# Altium PCB ESP-WROOM32.PcbDoc (part 1 of 3)
Units mm, origin at the board's own origin, x right, y up, seen from the top; angles counter-clockwise.
Board outline 17.3 x 15.5 mm, 2 copper layers (L1, L2); 42 components, 55 nets, 176 pads, 91 vias.
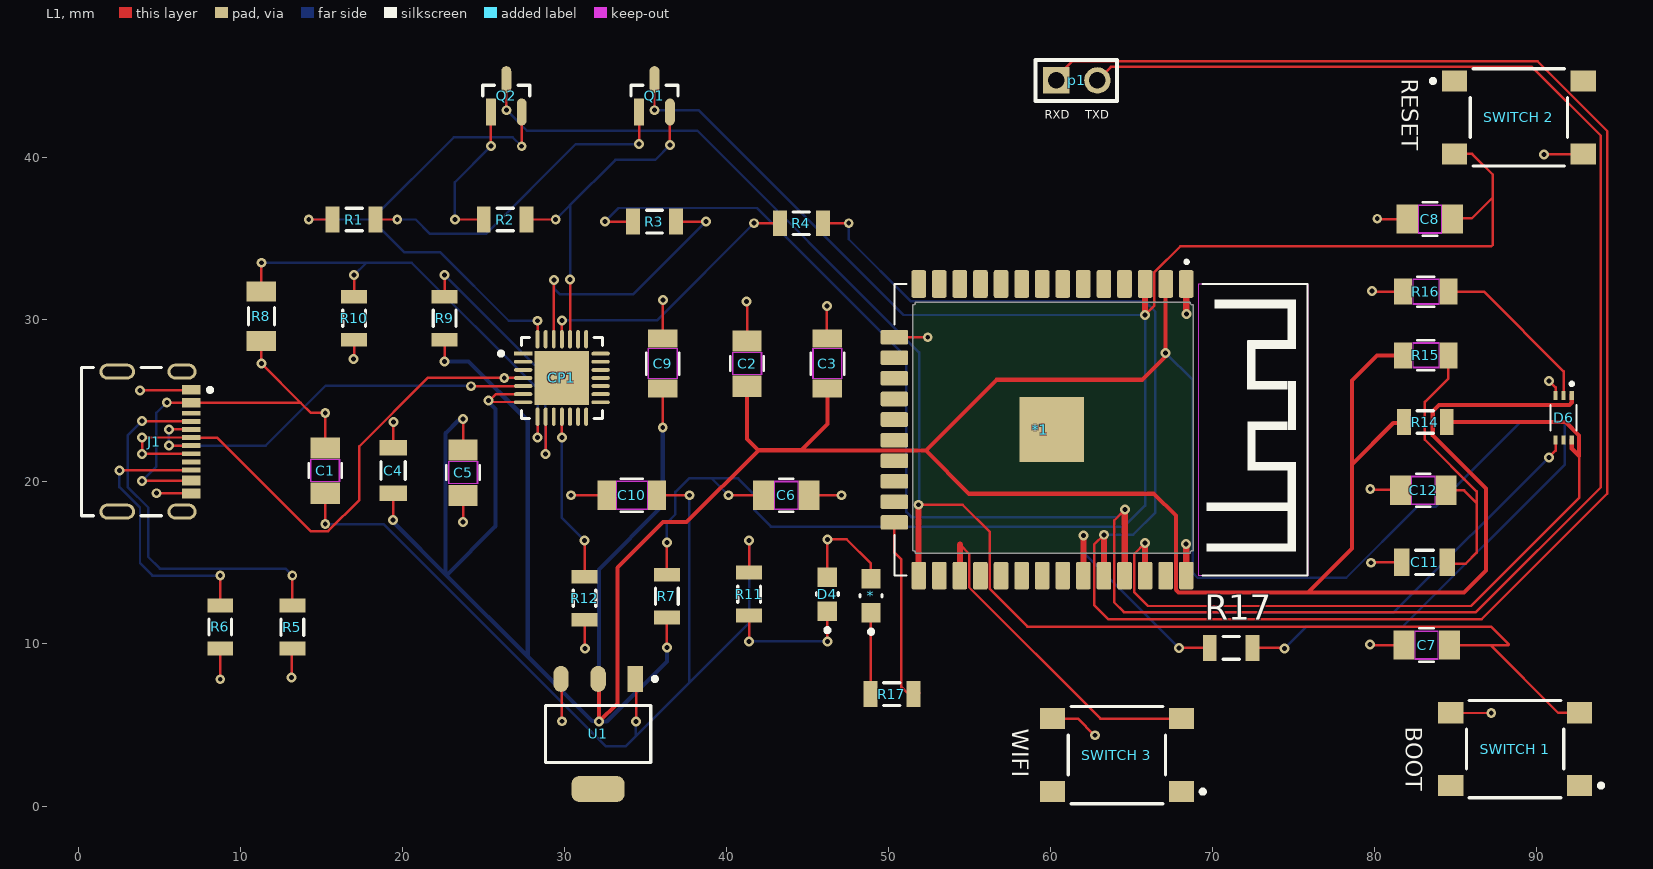
[diagram p0: L1 view]
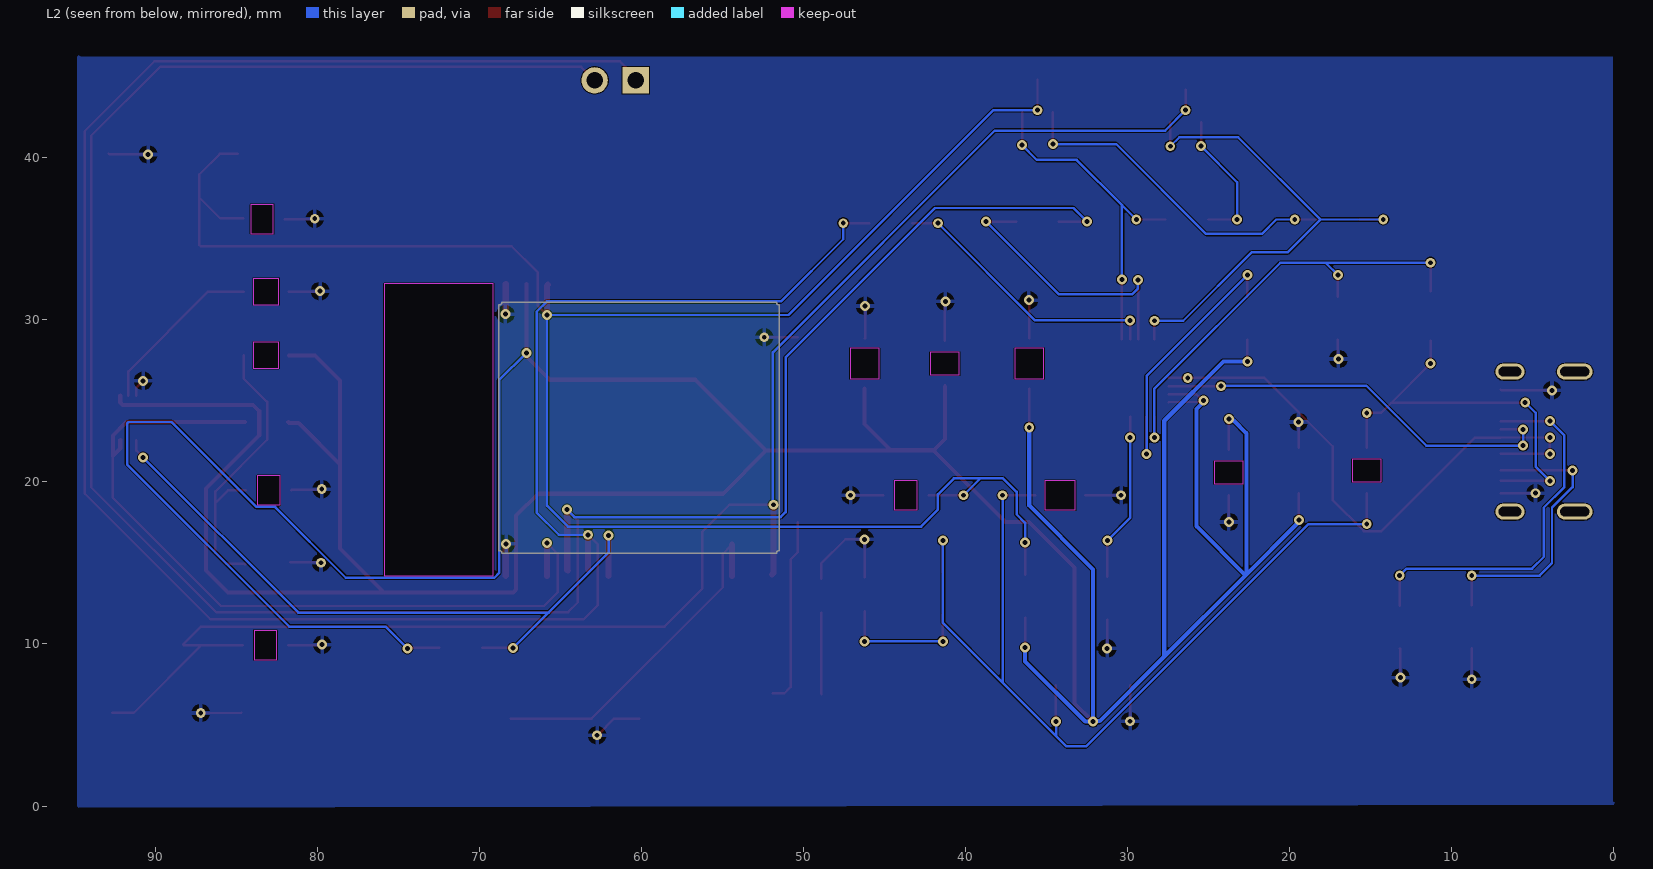
[diagram p1: L2 view, seen from below]

## Layer stack, top to bottom
Top Solder: solder mask 0.0102, Solder Resist, Dk 3.5
L1: signal copper 0.0356
Dielectric 1: prepreg 0.32, PP-006, Dk 4.8
L2: signal copper 0.0356
Bottom Solder: solder mask 0.0102, Solder Resist, Dk 3.5

## Board outline
68.624,31.093 51.663,31.093 51.664,31.072 51.662,31.044 51.654,31.016 51.641,30.991 51.623,30.969 51.602,30.95 51.577,30.936 51.55,30.926 51.522,30.922 51.494,30.923 51.494,15.762 51.522,15.763 51.55,15.759 51.577,15.75 51.602,15.735 51.623,15.717 51.641,15.694 51.654,15.669 51.662,15.642 51.664,15.613 51.663,15.593 68.624,15.593 68.623,15.62 68.627,15.648 68.636,15.674 68.649,15.698 68.667,15.719 68.688,15.737 68.712,15.75 68.739,15.759 68.766,15.763 68.794,15.762 68.794,30.923 68.766,30.922 68.739,30.926 68.712,30.935 68.688,30.948 68.667,30.966 68.649,30.987 68.636,31.011 68.627,31.038 68.623,31.065

## Design rules (kind name [scope] priority, off if disabled: settings)
Clearance [All] p1: gap=0.051 ignorepadtopadclearanceinfootprint=FALSE
MinimumSolderMaskSliver [All] p1: minsoldermaskwidth=0.076
PlaneConnect [All] p1: planeconnectstyle=Direct reliefexpansion=0.508 reliefentries=4 reliefconductorwidth=0.254 reliefairgap=0.254
PolygonConnect [All] p1: connectstyle=Relief reliefconductorwidth=0.254 reliefentries=4 polygonreliefangle="90 Angle" airgapwidth=0.254
RoutingVias [All] p1: holewidth=0.305 width=0.61 viastyle="Through Hole" minholewidth=0.305 minwidth=0.61 maxholewidth=0.305 maxwidth=0.61
SilkToSolderMaskClearance [IsPad] p1: minsilkscreentomaskgap=0.102 clearancetoexposedcopper=TRUE
SolderMaskExpansion [All] p1: expansion=0.076 istentingtop=FALSE
SupplyNets "Schematic Supply Nets_1" [InNet('VDD33')] p1: voltage=0.000
SupplyNets "Schematic Supply Nets_3" [InNet('GND')] p2: voltage=0.000
SupplyNets "Schematic Supply Nets_2" [InNet('EXT_5V')] p3: voltage=0.000
SupplyNets "Schematic Supply Nets" [InNet('VBUS')] p4: voltage=0.000
Width [All] p1: maxlimit=2.54 minlimit=0.152 preferedwidth=0.152 minimp=50.000000 maximp=50.000000 favimp=50.000000
27 further rules are at their usual default settings.

## Components (designator, comment, footprint, x,y, rotation, side; value= is the part's Value field where it differs from the comment)
* "LTST-C170GKT" FP-LTST-C170GKT-MFG 48.92,12.979 r90 top
*1 "ESP32-WROOM-32E-N4" MODULE_ESP-WROOM-32 60.122,23.216 r270 top
C1 "0.1uF/50V(10%)" CAPC340180_135N_KEM 15.24,20.701 r270 top value=100nF
C2 "0.1uF/50V(10%)" CAPC340180_135N_KEM 41.275,27.305 r270 top value=100nF
C3 "22uF/10V(20%)" CAP_CC1206_YAG 46.228,27.305 r270 top value=22µF
C4 "10uF/10V(20%)" CAPC1206(3216)190_L 19.431,20.701 r270 top value=10µF
C5 "0.1uF/50V(10%)" CAPC340180_135N_KEM 23.749,20.574 r90 top value=100nF
C6 "0.1uF/50V(10%)" CAPC340180_135N_KEM 43.688,19.177 r180 top value=100nF
C7 "0.1uF/50V(10%)" CAPC340180_135N_KEM 83.21,9.931 r0 top value=100nF
C8 "0.1uF/50V(10%)" CAPC340180_135N_KEM 83.414,36.22 r0 top value=100nF
C9 "22uF/10V(20%)" CAP_CC1206_YAG 36.068,27.305 r270 top value=22µF
C10 "22uF/10V(20%)" CAP_CC1206_YAG 34.163,19.177 r0 top value=22µF
C11 "10uF/10V(20%)" CAPC1206(3216)190_L 83.083,15.037 r0 top value=10µF
C12 "0.1uF/50V(10%)" CAPC340180_135N_KEM 83.007,19.482 r0 top value=100nF
CP1 "CP2102N-A02-GQFN28" FP-CP2102N-A02-GQFN28-IPC_A 29.845,26.416 r0 top
D4 "LTST-C170GKT" FP-LTST-C170GKT-MFG 46.228,13.081 r90 top
D6 "BH1750" XDCR_BH1750FVI-TR 91.669,23.952 r270 top
J1 "USB-C" FP-2171790001-MFG 3.554,22.489 r270 top
p1 "342-10-102-00-591000" header 60.35,44.78 r90 top
Q1 "SS8050-G" FP-SS8050-G-IPC_A 35.56,43.83 r90 top
Q2 "SS8050-G" FP-SS8050-G-IPC_A 26.416,43.83 r90 top
R1 "10K(5%)" "RESC3116X65X40LL10T20 - duplicate" 17.018,36.195 r0 top value=10kΩ
R2 "10K(5%)" "RESC3116X65X40LL10T20 - duplicate" 26.344,36.195 r180 top value=10kΩ
R3 "10K(5%)" "RESC3116X65X40LL10T20 - duplicate" 35.56,36.068 r180 top value=10kΩ
R4 "10K(5%)" "RESC3116X65X40LL10T20 - duplicate" 44.628,35.966 r0 top value=10kΩ
R5 "5.1K" RESC3116X65X40LL10T20 13.208,11.043 r90 top value=5.1kΩ
R6 "5.1K" RESC3116X65X40LL10T20 8.763,11.049 r90 top value=5.1kΩ
R7 "10K(5%)" "RESC3116X65X40LL10T20 - duplicate" 36.322,12.954 r270 top value=10kΩ
R8 "22.1K(1%)" FP-AC1206-IPC_A 11.303,30.226 r90 top value=22.1kΩ
R9 "2K(5%)" RESC3116X65X40LL10T20 22.606,30.099 r90 top value=2kΩ
R10 "47.5K(1%)" "RESC3116X65X40LL10T20 - duplicate" 17.018,30.099 r90 top value=47.5kΩ
R11 "10K(5%)" "RESC3116X65X40LL10T20 - duplicate" 41.402,13.081 r90 top value=10kΩ
R12 "10K(5%)" "RESC3116X65X40LL10T20 - duplicate" 31.242,12.827 r90 top value=10kΩ
R14 "4.7KOHM" RESC3116X65X40LL10T20 83.134,23.698 r180 top value=47kΩ
R15 "1kohm" RC1206N_YAG 83.16,27.813 r180 top value=1kΩ
R16 "1kohm" RC1206N_YAG 83.16,31.75 r0 top value=1kΩ
R17 "4.7KOHM" RESC3116X65X40LL10T20 71.145,9.754 r0 top value=47kΩ
R17 "4.7KOHM" RESC3116X65X40LL10T20 50.216,6.909 r0 top value=47kΩ
"SWITCH 1" "PTS645SL50SMTR92LFS" FP-PTS645SH50SMTR92LFS-MFG 88.671,3.505 r180 top
"SWITCH 2" "PTS645SL50SMTR92LFS" FP-PTS645SH50SMTR92LFS-MFG 88.9,42.494 r0 top
"SWITCH 3" "PTS645SL50SMTR92LFS" FP-PTS645SH50SMTR92LFS-MFG 64.097,3.139 r180 top
U1 "AMS1117-3.3" FP-AMS1117-IPC_A 32.08,4.445 r270 top

## Footprints (in the part's own frame and the unit in brackets; to place one, negate y for a bottom-side part, rotate by r counter-clockwise, add the part's x,y. Pads: shape width x height; smd on the part's side, far side on the other; paste and mask are expansions set on the pad)
CAP_CC1206_YAG [mil]
  rect 44x71 smd paste+0 mask+0: 1(-61,0) 2(61,0)
  L1 keep-out region: -37,-33.5 -37,33.5 37,33.5 37,-33.5
  Keep-Out Layer region: -37,-35.5 -37,35.5 37,35.5 37,-35.5
  silkscreen extent -27,-41 27,41, body extent -69,-36 69,36, height 71
CAPC1206(3216)190_L [mm] "Chip Capacitor, Body 3.2x1.6mm, Height 1.9mm, IPC High Density"
  rect 0.95x1.7 smd: 1(-1.4,0) 2(1.4,0)
  silkscreen extent -0.55,-0.75 0.55,0.75, body extent -1.7,-0.9 1.7,0.9, height 1.9
CAPC340180_135N_KEM [mm]
  rect 1.306x1.8 smd paste+0 mask+0: 1(-1.403,0) 2(1.403,0)
  L1 keep-out region: -0.699,-0.849 -0.699,0.849 0.699,0.849 0.699,-0.849
  Keep-Out Layer region: -0.699,-0.9 -0.699,0.9 0.699,0.9 0.699,-0.9
  silkscreen extent -0.44,-1.03 0.44,1.03, body extent -1.7,-0.9 1.7,0.9, height 1.35
FP-2171790001-MFG [mm]
  rrect100% 1x1.8 hole 1.4 slot 0.6 at 0 deg paste-2539.97 mask+0: 1(-4.32,2.85) 2(4.32,2.85)
  rrect100% 1x2.2 hole 1.8 slot 0.6 at 0 deg paste-2539.97 mask+0: 3(-4.32,-1.15) 4(4.32,-1.15)
  rect 0.6x1.15 smd paste+0 mask+0: A1-B12(-3.2,3.425) A4-B9(-2.4,3.425) B1-A12(3.2,3.425) B4-A9(2.4,3.425)
  rect 0.3x1.15 smd paste+0 mask+0: A5(-1.25,3.425) A6(-0.25,3.425) A7(0.25,3.425) A8(1.25,3.425) B5(1.75,3.425) B6(0.75,3.425) B7(-0.75,3.425) B8(-1.75,3.425)
  silkscreen extent -4.57,-3.35 4.57,4.7, body extent -4.92,-3.45 4.92,4.1, height 0.25
FP-AC1206-IPC_A [mm]
  rect 1.258x1.812 smd paste+0 mask+0: 1(-1.527,0) 2(1.527,0)
  silkscreen extent -0.52,-0.8 0.52,0.8, body extent -2.66,-1.41 2.66,1.41, height 0.25
FP-AMS1117-IPC_A [mm]
  rect 1.604x0.952 smd paste+0 mask+0: 1(-3.395,2.29)
  rrect100% 1.604x0.952 smd paste+0 mask+0: 2(-3.395,0) 3(-3.395,-2.29)
  rrect59% 1.604x3.262 smd paste+0 mask+0: 4(3.395,0)
  silkscreen extent -3.52,-3.25 1.75,3.63, body extent -4.7,-3.75 4.7,3.75, height 0.25
FP-CP2102N-A02-GQFN28-IPC_A [mm]
  rect 1.131x0.242 smd paste+0 mask+0: 1(-2.391,1.5)
  rrect100% 1.131x0.242 smd paste+0 mask+0: 2(-2.391,1) 3(-2.391,0.5) 4(-2.391,0) 5(-2.391,-0.5) 6(-2.391,-1) 7(-2.391,-1.5) 15(2.391,-1.5) 16(2.391,-1) 17(2.391,-0.5) 18(2.391,0) 19(2.391,0.5) 20(2.391,1) 21(2.391,1.5)
  rrect100% 0.242x1.131 smd paste+0 mask+0: 8(-1.5,-2.391) 9(-1,-2.391) 10(-0.5,-2.391) 11(0,-2.391) 12(0.5,-2.391) 13(1,-2.391) 14(1.5,-2.391) 22(1.5,2.391) 23(1,2.391) 24(0.5,2.391) 25(0,2.391) 26(-0.5,2.391) 27(-1,2.391) 28(-1.5,2.391)
  rect 3.35x3.35 smd paste-1000 mask+0: 29(0,0)
  silkscreen extent -3.88,-2.5 2.5,2.5, body extent -3.46,-3.46 3.46,3.46, height 0.25
FP-LTST-C170GKT-MFG [mm]
  rect 1.2x1.2 smd paste+0 mask+0: 1(-1.05,0) 2(1.05,0)
  silkscreen extent -2.35,-0.67 0.08,0.67, body extent -1.75,-0.77 1.75,0.77, height 0.25
FP-PTS645SH50SMTR92LFS-MFG [mm]
  rect 1.55x1.3 smd paste+0 mask+0: 1(-3.975,2.25) 2(3.975,2.25) 3(-3.975,-2.25) 4(3.975,-2.25)
  silkscreen extent -5.43,-3 3,3, body extent -4.85,-3.1 4.85,3.1, height 0.25
FP-SS8050-G-IPC_A [mm]
  rect 1.657x0.612 smd paste+0 mask+0: 1(-1.001,0.95)
  rrect100% 1.657x0.612 smd paste+0 mask+0: 2(-1.001,-0.95) 3(1.001,0)
  silkscreen extent 0,-1.45 0.65,1.45, body extent -2.33,-1.95 2.33,1.95, height 0.25
header [mil]
  rect 64x64 hole 40: 1(0,0)
  round 64 hole 40: 2(0,-100)
  silkscreen extent -50,-148 50,50
MODULE_ESP-WROOM-32 [mm]
  rrect22% 1.7x0.9 smd: 1(-9,8.255) 2(-9,6.985) 3(-9,5.715) 4(-9,4.445) 5(-9,3.175) 6(-9,1.905) 7(-9,0.635) 8(-9,-0.635) 9(-9,-1.905) 10(-9,-3.175) 11(-9,-4.445) 12(-9,-5.715) 13(-9,-6.985) 14(-9,-8.255) 25(9,-8.255) 26(9,-6.985) 27(9,-5.715) 28(9,-4.445) 29(9,-3.175) 30(9,-1.905) 31(9,-0.635) 32(9,0.635) 33(9,1.905) 34(9,3.175) 35(9,4.445) 36(9,5.715) 37(9,6.985) 38(9,8.255)
  rect 4x4 smd: 1.1(-0.025,-0.051)
  rrect22% 0.9x1.7 smd: 15(-5.715,-9.755) 16(-4.445,-9.755) 17(-3.175,-9.755) 18(-1.905,-9.755) 19(-0.635,-9.755) 20(0.635,-9.755) 21(1.905,-9.755) 22(3.175,-9.755) 23(4.445,-9.755) 24(5.715,-9.755)
  Keep-Out Layer region: 9,9.012 -9.012,9.012 -9.012,15.75 9,15.75
  Keep-Out Layer region: 9,9.026 -9.026,9.026 -9.026,15.75 9,15.75
  silkscreen extent -10.46,-9.75 9,15.75, body extent -9.13,-9.78 8.87,15.72, height 0.01
RC1206N_YAG [mil]
  rect 44x63 smd paste+0 mask+0: 1(-55,0) 2(55,0)
  L1 keep-out region: -31,-29.5 -31,29.5 31,29.5 31,-29.5
  Keep-Out Layer region: -31,-31.5 -31,31.5 31,31.5 31,-31.5
  silkscreen extent -21,-36 21,36, body extent -63,-31 63,31, height 28
RESC3116X65X40LL10T20 [mm] "Chip Resistor, 2-Leads, Body 3.10x1.60mm, IPC High Density"
  rect 0.85x1.6 smd: 1(-1.325,0) 2(1.325,0)
  silkscreen extent -0.5,-0.7 0.5,0.7, body extent -1.6,-0.85 1.6,0.85, height 0.65
"RESC3116X65X40LL10T20 - duplicate" [mm] "Chip Resistor, 2-Leads, Body 3.10x1.60mm, IPC High Density"
  rect 0.85x1.6 smd: 1(-1.325,0) 2(1.325,0)
  silkscreen extent -0.5,-0.7 0.5,0.7, body extent -1.6,-0.85 1.6,0.85, height 0.65
XDCR_BH1750FVI-TR [mm]
  rect 0.55x0.25 smd: 1(-1.375,0.5) 2(-1.375,0) 3(-1.375,-0.5) 4(1.375,-0.5) 5(1.375,0) 6(1.375,0.5)
  silkscreen extent -2.2,-0.8 0.78,0.8, body extent -1.5,-0.8 1.5,0.8, height 0.75

## Part data
* D4: "LED GREEN CLEAR SMD", Case Code (Imperial)=0805, Case Code (Metric)=2012, Color=Green, Current=4A, Forward Current=30mA, Forward Voltage=2.6V, LCSC part number=C125090, Lens Color="Clear, Colorless", Manufacturer=Lite-On, Max Operating Temperature=85°C, Min Operating Temperature=-55°C, Power Dissipation=100mW, Reverse Voltage=5V, Supplier Part Number=160-1179-1-ND, Test Current=10mA, Case/Package=0805, Category=LEDs, China RoHS=Compliant, ComponentLink1Description=https://datasheet.octopart.com:443/LTST-C170GKT-Lite-On-datasheet-180605137.pdf?src-supplier=IHS, ComponentLink1URL=https://datasheet.octopart.com:443/LTST-C170GKT-Lite-On-datasheet-180605137.pdf?src-supplier=IHS, ComponentLink2Description=https://datasheet.octopart.com:443/LTST-C170GKT-Lite-On-datasheet-141439001.pdf?src-supplier=Upverter, ComponentLink2URL=https://datasheet.octopart.com:443/LTST-C170GKT-Lite-On-datasheet-141439001.pdf?src-supplier=Upverter, ComponentLink3Description=https://datasheet.octopart.com:443/LTST-C170GKT-Lite-On-datasheet-159307.pdf?src-supplier=Arrow+Electronics, ComponentLink3URL=https://datasheet.octopart.com:443/LTST-C170GKT-Lite-On-datasheet-159307.pdf?src-supplier=Arrow+Electronics, ComponentLink4Description=https://datasheet.octopart.com:443/LTST-C170GKT-Lite-On-datasheet-8330158.pdf?src-supplier=TME, ComponentLink4URL=https://datasheet.octopart.com:443/LTST-C170GKT-Lite-On-datasheet-8330158.pdf?src-supplier=TME, ComponentLink5Description=https://datasheet.octopart.com:443/LTST-C170GKT-Lite-On-datasheet-26684672.pdf?src-supplier=Future+Electronics, ComponentLink5URL=https://datasheet.octopart.com:443/LTST-C170GKT-Lite-On-datasheet-26684672.pdf?src-supplier=Future+Electronics, ComponentLink6Description=https://datasheet.octopart.com:443/LTST-C170GKT-Lite-On-datasheet-59241.pdf?src-supplier=DigiKey, ComponentLink6URL=https://datasheet.octopart.com:443/LTST-C170GKT-Lite-On-datasheet-59241.pdf?src-supplier=DigiKey, ComponentLink7Description=https://datasheet.octopart.com:443/LTST-C170GKT-Lite-On-datasheet-14174986.pdf?src-supplier=iiiC, ComponentLink7URL=https://datasheet.octopart.com:443/LTST-C170GKT-Lite-On-datasheet-14174986.pdf?src-supplier=iiiC, Depth=1.25mm, Dominant Wavelength=569nm, Height=1.1mm, Illumination Color=Green, Lead Free="Lead Free", Length=2mm, Lens Transparency=Clear, Lifecycle Status=Production, Luminous Intensity=6mcd, Manufacturer Part Number=LTST-C170GKT, Mounting Technology="Surface Mount", Number of Circuits=1, Number of Elements=1, Number of LEDs=1, Number of Terminals=2, Packaging="Tape and Reel", Peak Wavelength=565nm, Pins=2, Power Rating=100mW, Pricing="1=0.1, 10=0.066, 100=0.0453, 500=0.03552, 1000=0.03224 (USD)", Radiation Hardening=No, REACH SVHC=Yes, RoHS=Compliant, Schedule B="8541402000, 8541402000|8541402000|8541402000|8541402000|8541402000|8541402000|8541402000|8541402000|8541402000|8541402000|8541402000|8541402000|8541402000|8541402000|8541402000|8541402000|8541402000|8541402000|8541402000|8541402000|8541402000|8541402000|8541402000|85", Shape=Rectangular, Stock=1226220, Supplier=DigiKey, Terminal Pitch=2.1mm, Viewing Angle=130°, Voltage=5V, Wavelength=569nm, Width=1.25mm
*1: "RF TXRX MOD BT WIFI TH SMD", LCSC part number=C701341, Manufacturer="Espressif Systems", Max Operating Temperature=85°C, Max Supply Voltage=3.6V, Min Operating Temperature=-40°C, Min Supply Voltage=3V, Operating Supply Voltage=3.3V, Supplier Part Number=1965-ESP32-WROOM-32E-N4CT-ND, Category="System on Chip (SoC)", ComponentLink1Description=https://datasheet.octopart.com:443/ESP32-WROOM-32E-N4-Espressif-Systems-datasheet-182247776.pdf?src-supplier=IHS, ComponentLink1URL=https://datasheet.octopart.com:443/ESP32-WROOM-32E-N4-Espressif-Systems-datasheet-182247776.pdf?src-supplier=IHS, ComponentLink2Description=https://datasheet.octopart.com:443/ESP32-WROOM-32E-N4-Espressif-Systems-datasheet-188867343.pdf?src-supplier=TME, ComponentLink2URL=https://datasheet.octopart.com:443/ESP32-WROOM-32E-N4-Espressif-Systems-datasheet-188867343.pdf?src-supplier=TME, ComponentLink3Description=https://datasheet.octopart.com:443/ESP32-WROOM-32E-N4-Espressif-Systems-datasheet-165560559.pdf?src-supplier=TME, ComponentLink3URL=https://datasheet.octopart.com:443/ESP32-WROOM-32E-N4-Espressif-Systems-datasheet-165560559.pdf?src-supplier=TME, ComponentLink4Description=https://datasheet.octopart.com:443/ESP32-WROOM-32E-N4-Espressif-Systems-datasheet-151884363.pdf?src-supplier=Future+Electronics, ComponentLink4URL=https://datasheet.octopart.com:443/ESP32-WROOM-32E-N4-Espressif-Systems-datasheet-151884363.pdf?src-supplier=Future+Electronics, Height - Seated (Max)=3.25mm, Length=25.5mm, Manufacturer Part Number=ESP32-WROOM-32E-N4, Number of Terminals=38, Pricing="1=4.84, 10=4.189, 25=3.9612, 100=3.649, 250=3.46184 (USD)", RoHS=Compliant, Stock=16186, Supplier=DigiKey, Terminal Pitch=1.27mm, Width=18mm
C1 C2 C5 C6 C7 C8 C12: library part C1206C104K5JACAUTO, "CAP CER 0.1UF 50V U2J 1206", Case/Package=1206, Dielectric=U2J, Dielectric Material=Ceramic, LCSC part number=C7229230, LSCS PART NUMBER=C2264143, Manufacturer="Samsung Electro-Mechanics", Manufacturer Part Number=CL05B104KB5NNWC, Max Operating Temperature=125°C, Min Operating Temperature=-55°C, Supplier Part Number=1276-CL05B104KB5NNWCCT-ND, Voltage Rating=50V, Category="Ceramic Capacitors", China RoHS=Compliant, ComponentLink1Description=https://datasheet.octopart.com:443/CL05B104KB5NNWC-Samsung-Electro-Mechanics-datasheet-182018729.pdf?src-supplier=IHS, ComponentLink1URL=https://datasheet.octopart.com:443/CL05B104KB5NNWC-Samsung-Electro-Mechanics-datasheet-182018729.pdf?src-supplier=IHS, ComponentLink2Description=https://datasheet.octopart.com:443/C1206C104K5JACAUTO-KEMET-datasheet-175574894.pdf?src-supplier=IHS, ComponentLink2URL=https://datasheet.octopart.com:443/C1206C104K5JACAUTO-KEMET-datasheet-175574894.pdf?src-supplier=IHS, ComponentLink3Description=https://datasheet.octopart.com:443/C1206C104K5JACAUTO-KEMET-datasheet-138896532.pdf?src-supplier=Upverter, ComponentLink3URL=https://datasheet.octopart.com:443/C1206C104K5JACAUTO-KEMET-datasheet-138896532.pdf?src-supplier=Upverter, ComponentLink4Description=https://datasheet.octopart.com:443/C1206C104K5JACAUTO-KEMET-datasheet-141421995.pdf?src-supplier=Farnell, ComponentLink4URL=https://datasheet.octopart.com:443/C1206C104K5JACAUTO-KEMET-datasheet-141421995.pdf?src-supplier=Farnell, ComponentLink5Description=https://datasheet.octopart.com:443/C1206C104K5JACAUTO-KEMET-datasheet-110724407.pdf?src-supplier=RS+(Formerly+Allied+Electronics), ComponentLink5URL=https://datasheet.octopart.com:443/C1206C104K5JACAUTO-KEMET-datasheet-110724407.pdf?src-supplier=RS+(Formerly+Allied+Electronics), Height=1.2mm, Length=3.2mm, Lifecycle Status=Production, Material=Ceramic, Mounting Technology="Surface Mount", Number of Terminals=2, Pricing="1=0.1, 10=0.054, 50=0.037, 100=0.0319, 500=0.02338, 1000=0.02075, 2500=0.018, 5000=0.01634 (USD)", REACH SVHC=Yes, RoHS=Compliant, Schedule B="8532240020, 8532240020|8532240020|8532240020|8532240020|8532240020", Stock=89724, Supplier=DigiKey, Voltage Rating (DC)=50V, Width=1.6mm
C3 C9 C10: library part CC1206MKX5R6BB226, "CAP CER 22UF 10V X5R 1206", Case Code (Imperial)=1206, Case Code (Metric)=3216, Case/Package=0402, Dielectric=X5R, Dielectric Material=Ceramic, LCSC part number=C3845593, LSCS PART NUMBER=C723738, Manufacturer=Murata, Manufacturer Lifecycle Status="IN PRODUCTION", Manufacturer Part Number=GRM158R61A226ME15D, Max Operating Temperature=85°C, Min Operating Temperature=-55°C, Supplier Part Number=490-GRM158R61A226ME15DCT-ND, Tolerance=20%, Voltage Rating=10V, Category="Ceramic Capacitors", China RoHS=Compliant, ComponentLink1Description=https://datasheet.octopart.com:443/GRM158R61A226ME15D-Murata-datasheet-165579666.pdf?src-supplier=TME, ComponentLink1URL=https://datasheet.octopart.com:443/GRM158R61A226ME15D-Murata-datasheet-165579666.pdf?src-supplier=TME, ComponentLink2Description=https://datasheet.octopart.com/GRM158R61A226ME15D-Murata-datasheet-12515295.pdf, ComponentLink2URL=https://datasheet.octopart.com/GRM158R61A226ME15D-Murata-datasheet-12515295.pdf, ComponentLink3Description=https://datasheet.octopart.com/GRM158R61A226ME15D-Murata-datasheet-12510076.pdf, ComponentLink3URL=https://datasheet.octopart.com/GRM158R61A226ME15D-Murata-datasheet-12510076.pdf, ComponentLink4Description=https://datasheet.octopart.com/GRM158R61A226ME15D-Murata-datasheet-11978611.pdf, ComponentLink4URL=https://datasheet.octopart.com/GRM158R61A226ME15D-Murata-datasheet-11978611.pdf, ComponentLink5Description=https://datasheet.octopart.com/GRM158R61A226ME15D-Murata-datasheet-10025737.pdf, ComponentLink5URL=https://datasheet.octopart.com/GRM158R61A226ME15D-Murata-datasheet-10025737.pdf, ComponentLink6Description=https://datasheet.octopart.com/GRM158R61A226ME15D-Murata-datasheet-8819587.pdf, ComponentLink6URL=https://datasheet.octopart.com/GRM158R61A226ME15D-Murata-datasheet-8819587.pdf, ComponentLink7Description=http://sigma.octopart.com:80/reach_statement/Murata-company-16.pdf?src-supplier=Compliance+Statements, ComponentLink7URL=http://sigma.octopart.com:80/reach_statement/Murata-company-16.pdf?src-supplier=Compliance+Statements, ComponentLink8Description=https://datasheet.octopart.com:443/CC1206MKX5R6BB226-Yageo-datasheet-170350636.pdf?src-supplier=IHS, ComponentLink8URL=https://datasheet.octopart.com:443/CC1206MKX5R6BB226-Yageo-datasheet-170350636.pdf?src-supplier=IHS, ComponentLink9Description=https://datasheet.octopart.com:443/CC1206MKX5R6BB226-Yageo-datasheet-182965674.pdf?src-supplier=Farnell, ComponentLink9URL=https://datasheet.octopart.com:443/CC1206MKX5R6BB226-Yageo-datasheet-182965674.pdf?src-supplier=Farnell, ComponentLink10Description=https://datasheet.octopart.com:443/CC1206MKX5R6BB226-Yageo-Group-datasheet-145016144.pdf?src-supplier=ODG+(Origin+Data+Global), ComponentLink10URL=https://datasheet.octopart.com:443/CC1206MKX5R6BB226-Yageo-Group-datasheet-145016144.pdf?src-supplier=ODG+(Origin+Data+Global), ComponentLink11Description=https://datasheet.octopart.com:443/CC1206MKX5R6BB226-Yageo-datasheet-137700085.pdf?src-supplier=Future+Electronics, ComponentLink11URL=https://datasheet.octopart.com:443/CC1206MKX5R6BB226-Yageo-datasheet-137700085.pdf?src-supplier=Future+Electronics, ComponentLink12Description=https://datasheet.octopart.com:443/CC1206MKX5R6BB226-Yageo-datasheet-82288757.pdf?src-supplier=Future+Electronics, ComponentLink12URL=https://datasheet.octopart.com:443/CC1206MKX5R6BB226-Yageo-datasheet-82288757.pdf?src-supplier=Future+Electronics, ComponentLink13Description=https://datasheet.octopart.com:443/CC1206MKX5R6BB226-Yageo-datasheet-78855685.pdf?src-supplier=Future+Electronics, ComponentLink13URL=https://datasheet.octopart.com:443/CC1206MKX5R6BB226-Yageo-datasheet-78855685.pdf?src-supplier=Future+Electronics, ComponentLink14Description=https://datasheet.octopart.com:443/CC1206MKX5R6BB226-Yageo-datasheet-62336348.pdf?src-supplier=Future+Electronics, ComponentLink14URL=https://datasheet.octopart.com:443/CC1206MKX5R6BB226-Yageo-datasheet-62336348.pdf?src-supplier=Future+Electronics, ComponentLink15Description=https://datasheet.octopart.com:443/CC1206MKX5R6BB226-Yageo-datasheet-68298032.pdf?src-supplier=Future+Electronics, ComponentLink15URL=https://datasheet.octopart.com:443/CC1206MKX5R6BB226-Yageo-datasheet-68298032.pdf?src-supplier=Future+Electronics, ComponentLink16Description=https://datasheet.octopart.com/CC1206MKX5R6BB226-Yageo-datasheet-86397281.pdf, ComponentLink16URL=https://datasheet.octopart.com/CC1206MKX5R6BB226-Yageo-datasheet-86397281.pdf, ComponentLink17Description=http://sigma.octopart.com:80/rohs_statement/Yageo-company-2.pdf?src-supplier=Compliance+Statements, ComponentLink17URL=http://sigma.octopart.com:80/rohs_statement/Yageo-company-2.pdf?src-supplier=Compliance+Statements, ComponentLink18Description=http://sigma.octopart.com:80/conflict_mineral_statement/Yageo-company-3.pdf?src-supplier=Compliance+Statements, ComponentLink18URL=http://sigma.octopart.com:80/conflict_mineral_statement/Yageo-company-3.pdf?src-supplier=Compliance+Statements, Halogen Free="Halogen Free", Height=800µm, Lead Free="Lead Free", Length=1mm, Lifecycle Status=Production, Material=Ceramic, Mounting Technology="Surface Mount", Number of Terminals=2, Pricing="1=0.41, 10=0.247, 50=0.1828, 100=0.1632, 500=0.1301, 1000=0.1199, 2500=0.10912 (USD)", REACH SVHC=Yes, RoHS=Compliant, Schedule B="8532240020, 8532240020|8532240020|8532240020|8532240020|8532240020", Stock=340623, Supplier=DigiKey, Thickness=800µm, Voltage Rating (DC)=10V, Width=500µm
C4 C11: library part CC1206KKX5R6BB106, "CAP CER 10UF 10V X5R 1206", Case Code (Imperial)=1206, Case Code (Metric)=3216, Case/Package=0402, Dielectric=X5R, Dielectric Material=Ceramic, LCSC part number=C962143, LSCS PART NUMBER=C527332, Manufacturer="Yageo Group", Manufacturer Part Number=CC0402MRX5R6BB106, Max Operating Temperature=85°C, Min Operating Temperature=-55°C, Supplier Part Number=13-CC0402MRX5R6BB106CT-ND, Tolerance=10%, Voltage Rating=10V, Category="Ceramic Capacitors", China RoHS=Compliant, ComponentLink1Description=https://datasheet.octopart.com:443/CC0402MRX5R6BB106-Yageo-datasheet-170350636.pdf?src-supplier=IHS, ComponentLink1URL=https://datasheet.octopart.com:443/CC0402MRX5R6BB106-Yageo-datasheet-170350636.pdf?src-supplier=IHS, ComponentLink2Description=https://datasheet.octopart.com:443/CC0402MRX5R6BB106-Yageo-Group-datasheet-189192896.pdf?src-supplier=TME, ComponentLink2URL=https://datasheet.octopart.com:443/CC0402MRX5R6BB106-Yageo-Group-datasheet-189192896.pdf?src-supplier=TME, ComponentLink3Description=https://datasheet.octopart.com:443/CC0402MRX5R6BB106-Yageo-datasheet-182029486.pdf?src-supplier=Newark, ComponentLink3URL=https://datasheet.octopart.com:443/CC0402MRX5R6BB106-Yageo-datasheet-182029486.pdf?src-supplier=Newark, ComponentLink4Description=https://datasheet.octopart.com:443/CC0402MRX5R6BB106-Yageo-datasheet-158238148.pdf?src-supplier=Newark, ComponentLink4URL=https://datasheet.octopart.com:443/CC0402MRX5R6BB106-Yageo-datasheet-158238148.pdf?src-supplier=Newark, ComponentLink5Description=https://datasheet.octopart.com/CC0402MRX5R6BB106-Yageo-datasheet-86397281.pdf, ComponentLink5URL=https://datasheet.octopart.com/CC0402MRX5R6BB106-Yageo-datasheet-86397281.pdf, ComponentLink6Description=https://datasheet.octopart.com:443/CC0402MRX5R6BB106-Yageo-datasheet-175963154.pdf?src-supplier=element14+APAC, ComponentLink6URL=https://datasheet.octopart.com:443/CC0402MRX5R6BB106-Yageo-datasheet-175963154.pdf?src-supplier=element14+APAC, ComponentLink7Description=https://datasheet.octopart.com:443/CC0402MRX5R6BB106-Yageo-Group-datasheet-145016144.pdf?src-supplier=ODG+(Origin+Data+Global), ComponentLink7URL=https://datasheet.octopart.com:443/CC0402MRX5R6BB106-Yageo-Group-datasheet-145016144.pdf?src-supplier=ODG+(Origin+Data+Global), ComponentLink8Description=https://datasheet.octopart.com:443/CC0402MRX5R6BB106-Yageo-datasheet-62067349.pdf?src-supplier=Future+Electronics, ComponentLink8URL=https://datasheet.octopart.com:443/CC0402MRX5R6BB106-Yageo-datasheet-62067349.pdf?src-supplier=Future+Electronics, ComponentLink9Description=http://sigma.octopart.com:80/conflict_mineral_statement/Yageo-company-3.pdf?src-supplier=Compliance+Statements, ComponentLink9URL=http://sigma.octopart.com:80/conflict_mineral_statement/Yageo-company-3.pdf?src-supplier=Compliance+Statements, ComponentLink10Description=http://sigma.octopart.com:80/rohs_statement/Yageo-company-2.pdf?src-supplier=Compliance+Statements, ComponentLink10URL=http://sigma.octopart.com:80/rohs_statement/Yageo-company-2.pdf?src-supplier=Compliance+Statements, ComponentLink11Description=https://datasheet.octopart.com:443/CC1206KKX5R6BB106-Yageo-datasheet-170350636.pdf?src-supplier=IHS, ComponentLink11URL=https://datasheet.octopart.com:443/CC1206KKX5R6BB106-Yageo-datasheet-170350636.pdf?src-supplier=IHS, ComponentLink12Description=https://datasheet.octopart.com:443/CC1206KKX5R6BB106-Yageo-datasheet-10911834.pdf?src-supplier=element14+APAC, ComponentLink12URL=https://datasheet.octopart.com:443/CC1206KKX5R6BB106-Yageo-datasheet-10911834.pdf?src-supplier=element14+APAC, ComponentLink13Description=https://datasheet.octopart.com:443/CC1206KKX5R6BB106-Yageo-datasheet-62067349.pdf?src-supplier=element14+APAC, ComponentLink13URL=https://datasheet.octopart.com:443/CC1206KKX5R6BB106-Yageo-datasheet-62067349.pdf?src-supplier=element14+APAC, ComponentLink14Description=https://datasheet.octopart.com:443/CC1206KKX5R6BB106-Yageo-datasheet-181970622.pdf?src-supplier=Farnell, ComponentLink14URL=https://datasheet.octopart.com:443/CC1206KKX5R6BB106-Yageo-datasheet-181970622.pdf?src-supplier=Farnell, ComponentLink15Description=https://datasheet.octopart.com:443/CC1206KKX5R6BB106-Yageo-datasheet-181970623.pdf?src-supplier=Farnell, ComponentLink15URL=https://datasheet.octopart.com:443/CC1206KKX5R6BB106-Yageo-datasheet-181970623.pdf?src-supplier=Farnell, ComponentLink16Description=https://datasheet.octopart.com:443/CC1206KKX5R6BB106-Yageo-datasheet-175963154.pdf?src-supplier=JRH+Electronics, ComponentLink16URL=https://datasheet.octopart.com:443/CC1206KKX5R6BB106-Yageo-datasheet-175963154.pdf?src-supplier=JRH+Electronics, ComponentLink17Description=https://datasheet.octopart.com:443/CC1206KKX5R6BB106-Yageo-datasheet-158238148.pdf?src-supplier=Newark, ComponentLink17URL=https://datasheet.octopart.com:443/CC1206KKX5R6BB106-Yageo-datasheet-158238148.pdf?src-supplier=Newark, ComponentLink18Description=https://datasheet.octopart.com:443/CC1206KKX5R6BB106-Yageo-datasheet-8359971.pdf?src-supplier=Newark, ComponentLink18URL=https://datasheet.octopart.com:443/CC1206KKX5R6BB106-Yageo-datasheet-8359971.pdf?src-supplier=Newark, ComponentLink19Description=https://datasheet.octopart.com/CC1206KKX5R6BB106-Yageo-datasheet-86397281.pdf, ComponentLink19URL=https://datasheet.octopart.com/CC1206KKX5R6BB106-Yageo-datasheet-86397281.pdf, ComponentLink20Description=https://datasheet.octopart.com:443/CC1206KKX5R6BB106-Yageo-datasheet-8324442.pdf?src-supplier=Future+Electronics, ComponentLink20URL=https://datasheet.octopart.com:443/CC1206KKX5R6BB106-Yageo-datasheet-8324442.pdf?src-supplier=Future+Electronics, ComponentLink21Description=https://datasheet.octopart.com:443/CC1206KKX5R6BB106-Yageo-datasheet-137875056.pdf?src-supplier=Future+Electronics, ComponentLink21URL=https://datasheet.octopart.com:443/CC1206KKX5R6BB106-Yageo-datasheet-137875056.pdf?src-supplier=Future+Electronics, ComponentLink22Description=https://datasheet.octopart.com:443/CC1206KKX5R6BB106-Yageo-datasheet-59875459.pdf?src-supplier=Future+Electronics, ComponentLink22URL=https://datasheet.octopart.com:443/CC1206KKX5R6BB106-Yageo-datasheet-59875459.pdf?src-supplier=Future+Electronics, ComponentLink23Description=https://datasheet.octopart.com:443/CC1206KKX5R6BB106-Yageo-datasheet-27626583.pdf?src-supplier=Future+Electronics, ComponentLink23URL=https://datasheet.octopart.com:443/CC1206KKX5R6BB106-Yageo-datasheet-27626583.pdf?src-supplier=Future+Electronics, ComponentLink24Description=https://datasheet.octopart.com:443/CC1206KKX5R6BB106-Yageo-datasheet-24580494.pdf?src-supplier=Future+Electronics, ComponentLink24URL=https://datasheet.octopart.com:443/CC1206KKX5R6BB106-Yageo-datasheet-24580494.pdf?src-supplier=Future+Electronics, ComponentLink25Description=https://datasheet.octopart.com:443/CC1206KKX5R6BB106-Yageo-datasheet-14389981.pdf?src-supplier=Future+Electronics, ComponentLink25URL=https://datasheet.octopart.com:443/CC1206KKX5R6BB106-Yageo-datasheet-14389981.pdf?src-supplier=Future+Electronics, ComponentLink26Description=https://datasheet.octopart.com:443/CC1206KKX5R6BB106-Yageo-datasheet-149070021.pdf?src-supplier=TME, ComponentLink26URL=https://datasheet.octopart.com:443/CC1206KKX5R6BB106-Yageo-datasheet-149070021.pdf?src-supplier=TME, ComponentLink27Description=https://datasheet.octopart.com:443/CC1206KKX5R6BB106-Yageo-Group-datasheet-145016144.pdf?src-supplier=ODG+(Origin+Data+Global), ComponentLink27URL=https://datasheet.octopart.com:443/CC1206KKX5R6BB106-Yageo-Group-datasheet-145016144.pdf?src-supplier=ODG+(Origin+Data+Global), Composition=Ceramic, Depth=1.6mm, Halogen Free="Halogen Free", Height=500µm, Lead Free="Lead Free", Length=1mm, Lifecycle Status=Production, Mounting Technology="Surface Mount", Number of Terminals=2, Pins=2, Pricing="1=0.21, 10=0.121, 50=0.0866, 100=0.076, 500=0.05824, 1000=0.05277, 2500=0.04701, 5000=0.04354 (USD)", Radiation Hardening=No, REACH SVHC=Yes, RoHS=Compliant, Stock=59624, Supplier=DigiKey, Termination=SMD/SMT, Thickness=1.8034mm, Voltage Rating (AC)=10V, Voltage Rating (DC)=10V, Weight=16.187578mg, Width=500µm
CP1: "USB Bridge, USB to UART USB 2.0 UART Interface 28-QFN (5x5)", Ambient Temperature Range High=85°C, LCSC part number=C964632, Manufacturer="Silicon Labs", Manufacturer Lifecycle Status="FULL PRODUCTION", Max Junction Temperature (Tj)=105°C, Max Supply Voltage=3.6V, Min Operating Temperature=-40°C, Min Supply Voltage=3V, Operating Supply Voltage=3.3V, Supplier Part Number=336-5889-ND, Category="USB Interface ICs", China RoHS=Compliant, ComponentLink1Description=https://datasheet.octopart.com:443/CP2102N-A02-GQFN28-Silicon-Labs-datasheet-138898368.pdf?src-supplier=Augswan, ComponentLink1URL=https://datasheet.octopart.com:443/CP2102N-A02-GQFN28-Silicon-Labs-datasheet-138898368.pdf?src-supplier=Augswan, ComponentLink2Description=https://datasheet.octopart.com:443/CP2102N-A02-GQFN28-Silicon-Labs-datasheet-166051788.pdf?src-supplier=IHS, ComponentLink2URL=https://datasheet.octopart.com:443/CP2102N-A02-GQFN28-Silicon-Labs-datasheet-166051788.pdf?src-supplier=IHS, Data Rate=1.5Mbps, Height=800µm, Height - Seated (Max)=800µm, Interface=UART, Length=5mm, Lifecycle Status=Production, Manufacturer Part Number=CP2102N-A02-GQFN28, Max Operating Temperature=85°C, Number of Digital IO=7, Number of Ports=1, Number of Terminals=28, Pricing="1=4.32, 10=3.275, 73=2.78205, 146=2.66534, 292=2.56928, 511=2.50429, 1022=2.43673, 2555=2.36542 (USD)", REACH SVHC=Yes, RoHS=Compliant, Stock=1307, Supplier=DigiKey, Terminal Pitch=500µm, USB Standard="USB 2.0", Width=5mm
D6: library part BH1750FVI-TR, "SENSOR OPT 560NM AMBIENT 6WSOF", Case/Package=SMD/SMT, Clock Frequency=400kHz, LCSC part number=C78960, Manufacturer=ROHM, Max Operating Temperature=85°C, Max Power Dissipation=260mW, Max Supply Voltage=3.6V, Min Operating Temperature=-40°C, Min Supply Voltage=2.4V, Operating Supply Current=120µA, Operating Supply Voltage=3V, Supplier Part Number=BH1750FVICT-ND, Category="Optical Sensors", ComponentLink1Description=https://sigma.octopart.com:443/169791153/technical_drawing/ROHM-BH1750FVI-TR.pdf?src-supplier=Upverter, ComponentLink1URL=https://sigma.octopart.com:443/169791153/technical_drawing/ROHM-BH1750FVI-TR.pdf?src-supplier=Upverter, ComponentLink2Description=https://datasheet.octopart.com:443/BH1750FVI-TR-Rohm-datasheet-141422541.pdf?src-supplier=Upverter, ComponentLink2URL=https://datasheet.octopart.com:443/BH1750FVI-TR-Rohm-datasheet-141422541.pdf?src-supplier=Upverter, ComponentLink3Description=https://datasheet.octopart.com:443/BH1750FVI-TR-ROHM-datasheet-169791149.pdf?src-supplier=Upverter, ComponentLink3URL=https://datasheet.octopart.com:443/BH1750FVI-TR-ROHM-datasheet-169791149.pdf?src-supplier=Upverter, ComponentLink4Description=https://datasheet.octopart.com:443/BH1750FVI-TR-Rohm-datasheet-25365051.pdf?src-supplier=Newark, ComponentLink4URL=https://datasheet.octopart.com:443/BH1750FVI-TR-Rohm-datasheet-25365051.pdf?src-supplier=Newark, ComponentLink5Description=https://datasheet.octopart.com:443/BH1750FVI-TR-Rohm-datasheet-8331172.pdf?src-supplier=_legacy+Avnet, ComponentLink5URL=https://datasheet.octopart.com:443/BH1750FVI-TR-Rohm-datasheet-8331172.pdf?src-supplier=_legacy+Avnet, ComponentLink6Description=https://datasheet.octopart.com:443/BH1750FVI-TR-Rohm-datasheet-145014626.pdf?src-supplier=Future+Electronics, ComponentLink6URL=https://datasheet.octopart.com:443/BH1750FVI-TR-Rohm-datasheet-145014626.pdf?src-supplier=Future+Electronics, ComponentLink7Description=https://datasheet.octopart.com:443/BH1750FVI-TR-Rohm-datasheet-14434783.pdf?src-supplier=Factory+Futures, ComponentLink7URL=https://datasheet.octopart.com:443/BH1750FVI-TR-Rohm-datasheet-14434783.pdf?src-supplier=Factory+Futures, Contact Plating="Copper, Tin", Height=750µm, Height - Seated (Max)=750µm, Interface="I2C, Serial", Lead Free="Lead Free", Length=2.6mm, Lifecycle Status=Obsolete, Manufacturer Part Number=BH1750FVI-TR, Mounting Technology="Surface Mount", Number of Circuits=1, Number of Terminals=6, Output Type="Digital, I2C", Pins=6, Pricing="1=3.29, 5=2.934, 10=2.804, 25=2.648, 50=2.542, 100=2.4447, 500=2.24896, 1000=2.18484 (USD)", Radiation Hardening=No, REACH SVHC=Yes, RoHS=Compliant, Schedule B=8541409500, Sensing Method=Optical, Stock=3509, Supplier=DigiKey, Terminal Pitch=500µm, Type="Integrated Circuit (IC)", Wavelength=560nm, Width=1.6mm
J1: library part 2171790001, "CONN RCP USB2.0 TYP C 24P SMD RA", Contact Resistance=50mΩ, Current Rating=1.25A, Dielectric Material=Polyamide, Insulation Resistance=100MΩ, LCSC part number=C3197684, Manufacturer=Molex, Manufacturer Part Number=217179-0001, Max Operating Temperature=85°C, Min Operating Temperature=-40°C, Supplier Part Number=900-2171790001CT-ND, Voltage Rating=30V, Category="USB Connectors", ComponentLink1Description=https://datasheet.octopart.com:443/217179-0001-Molex-datasheet-158871109.pdf?src-supplier=ODG+(Origin+Data+Global), ComponentLink1URL=https://datasheet.octopart.com:443/217179-0001-Molex-datasheet-158871109.pdf?src-supplier=ODG+(Origin+Data+Global), ComponentLink2Description=https://sigma.octopart.com:443/158871110/technical_drawing/Molex-217179-0001.pdf?src-supplier=Upverter, ComponentLink2URL=https://sigma.octopart.com:443/158871110/technical_drawing/Molex-217179-0001.pdf?src-supplier=Upverter, ComponentLink3Description=https://datasheet.octopart.com:443/217179-0001-Molex-datasheet-164573281.pdf?src-supplier=RS+(Formerly+Allied+Electronics), ComponentLink3URL=https://datasheet.octopart.com:443/217179-0001-Molex-datasheet-164573281.pdf?src-supplier=RS+(Formerly+Allied+Electronics), ComponentLink4Description=http://sigma.octopart.com:80/conflict_mineral_statement/Molex-company-72.pdf?src-supplier=Compliance+Statements, ComponentLink4URL=http://sigma.octopart.com:80/conflict_mineral_statement/Molex-company-72.pdf?src-supplier=Compliance+Statements, ComponentLink5Description=http://sigma.octopart.com:80/rohs_statement/Molex-company-73.pdf?src-supplier=Compliance+Statements, ComponentLink5URL=http://sigma.octopart.com:80/rohs_statement/Molex-company-73.pdf?src-supplier=Compliance+Statements, ComponentLink6Description=http://sigma.octopart.com:80/reach_statement/Molex-company-74.pdf?src-supplier=Compliance+Statements, ComponentLink6URL=http://sigma.octopart.com:80/reach_statement/Molex-company-74.pdf?src-supplier=Compliance+Statements, Contact Gender=Female, Contact Material="Gold, Nickel", Gender=Receptacle, Height=3.36mm, Lifecycle Status=Production, Number of Contacts=16, Number of Ports=1, Number of Rows=1, Pins=16, Pricing="1=0.83, 10=0.704, 25=0.6596, 50=0.628, 100=0.598, 250=0.56052, 500=0.53374 (USD)", REACH SVHC=Yes, RoHS=Compliant, Shell Finish=Nickel, Shell Material="Stainless Steel", Stock=5295, Supplier=DigiKey, Terminal Pitch=500µm, USB Standard="USB 2.0"
p1: "Conn Hdr DIP Post 2POS Gold", LCSC part number=C17625479, Manufacturer=DigiKey, Supplier Part Number=ED10064-02-ND, Category=Uncategorized, Manufacturer Part Number=342-10-102-00-591000, Pricing="1=0.88, 10=0.749, 100=0.636, 500=0.56766, 1000=0.54056, 5000=0.48254, 10000=0.45952 (USD)", Stock=5642, Supplier=DigiKey
Q1 Q2: "TRANS NPN 25V 1.5A SOT-23-3", Case/Package=TO-236-3, Collector Base Voltage (VCBO)=40V, Collector Emitter Breakdown Voltage=25V, Collector Emitter Saturation Voltage=500mV, Emitter Base Voltage (VEBO)=5V, LCSC part number=C164886, Manufacturer=Comchip, Max Collector Current=1.5A, Max Junction Temperature (Tj)=150°C, Max Power Dissipation=300mW, Supplier Part Number=641-1790-1-ND, Transition Frequency=100MHz, Category=BJTs, Collector Emitter Voltage (VCEO)=25V, ComponentLink1Description=https://datasheet.octopart.com:443/SS8050-G-Comchip-datasheet-180131983.pdf?src-supplier=IHS, ComponentLink1URL=https://datasheet.octopart.com:443/SS8050-G-Comchip-datasheet-180131983.pdf?src-supplier=IHS, ComponentLink2Description=https://datasheet.octopart.com:443/SS8050-G-Comchip-datasheet-155422643.pdf?src-supplier=Upverter, ComponentLink2URL=https://datasheet.octopart.com:443/SS8050-G-Comchip-datasheet-155422643.pdf?src-supplier=Upverter, ComponentLink3Description=https://datasheet.octopart.com:443/SS8050-G-Comchip-datasheet-189767092.pdf?src-supplier=ODG+(Origin+Data+Global), ComponentLink3URL=https://datasheet.octopart.com:443/SS8050-G-Comchip-datasheet-189767092.pdf?src-supplier=ODG+(Origin+Data+Global), Height=1.15mm, hFE Min=40, Lifecycle Status=Production, Manufacturer Part Number=SS8050-G, Max Breakdown Voltage=25V, Max Operating Temperature=150°C, Mounting Technology="Surface Mount", Number of Elements=1, Number of Terminals=3, Power Dissipation=300mW, Pricing="1=0.24, 10=0.148, 100=0.0921, 500=0.06754, 1000=0.05958 (USD)", REACH SVHC=Yes, RoHS=Compliant, Schedule B=8541100070|8541100070|8541100070|8541100070|8541100070, Stock=59487, Supplier=DigiKey
R1 R2 R3 R4 R7 R11 R12: library part RC1206JR-1310KL, "RES 10K OHM 5% 1/4W 1206", Case Code (Imperial)=0402, Case Code (Metric)=3016, LCSC part number=C4117928, Manufacturer="Yageo Group", Manufacturer Part Number=RC0402JR-0710KL, Max Operating Temperature=155°C, Max Power Dissipation=63mW, Min Operating Temperature=-55°C, Power Dissipation=62.5mW, Supplier Part Number=311-10KJRCT-ND, Temperature Coefficient=100ppm/°C, Tolerance=5%, Voltage Rating=50V, Case/Package=0402, Category="Chip SMD Resistors", China RoHS=Non-Compliant, ComponentLink1Description=https://datasheet.octopart.com:443/RC0402JR-0710KL-Yageo-datasheet-175887523.pdf?src-supplier=IHS, ComponentLink1URL=https://datasheet.octopart.com:443/RC0402JR-0710KL-Yageo-datasheet-175887523.pdf?src-supplier=IHS, ComponentLink2Description=https://datasheet.octopart.com:443/RC0402JR-0710KL-Yageo-datasheet-10408619.pdf?src-supplier=Newark, ComponentLink2URL=https://datasheet.octopart.com:443/RC0402JR-0710KL-Yageo-datasheet-10408619.pdf?src-supplier=Newark, ComponentLink3Description=https://datasheet.octopart.com:443/RC0402JR-0710KL-Yageo-datasheet-505231.pdf?src-supplier=Newark, ComponentLink3URL=https://datasheet.octopart.com:443/RC0402JR-0710KL-Yageo-datasheet-505231.pdf?src-supplier=Newark, ComponentLink4Description=https://datasheet.octopart.com:443/RC0402JR-0710KL-Yageo-datasheet-141265859.pdf?src-supplier=Upverter, ComponentLink4URL=https://datasheet.octopart.com:443/RC0402JR-0710KL-Yageo-datasheet-141265859.pdf?src-supplier=Upverter, ComponentLink5Description=https://sigma.octopart.com:443/138820526/technical_drawing/Yageo-RC0402JR-0710KL.pdf?src-supplier=Upverter, ComponentLink5URL=https://sigma.octopart.com:443/138820526/technical_drawing/Yageo-RC0402JR-0710KL.pdf?src-supplier=Upverter, ComponentLink6Description=https://datasheet.octopart.com:443/RC0402JR-0710KL-Yageo-datasheet-62067350.pdf?src-supplier=Farnell, ComponentLink6URL=https://datasheet.octopart.com:443/RC0402JR-0710KL-Yageo-datasheet-62067350.pdf?src-supplier=Farnell, ComponentLink7Description=https://datasheet.octopart.com:443/RC0402JR-0710KL-Yageo-datasheet-12531192.pdf?src-supplier=Seeed+Studio, ComponentLink7URL=https://datasheet.octopart.com:443/RC0402JR-0710KL-Yageo-datasheet-12531192.pdf?src-supplier=Seeed+Studio, ComponentLink8Description=https://datasheet.octopart.com:443/RC0402JR-0710KL-Yageo-datasheet-8324527.pdf?src-supplier=TME, ComponentLink8URL=https://datasheet.octopart.com:443/RC0402JR-0710KL-Yageo-datasheet-8324527.pdf?src-supplier=TME, ComponentLink9Description=https://datasheet.octopart.com:443/RC0402JR-0710KL-Yageo-datasheet-164759695.pdf?src-supplier=Future+Electronics, ComponentLink9URL=https://datasheet.octopart.com:443/RC0402JR-0710KL-Yageo-datasheet-164759695.pdf?src-supplier=Future+Electronics, ComponentLink10Description=https://datasheet.octopart.com:443/RC0402JR-0710KL-Yageo-datasheet-137700087.pdf?src-supplier=Future+Electronics, ComponentLink10URL=https://datasheet.octopart.com:443/RC0402JR-0710KL-Yageo-datasheet-137700087.pdf?src-supplier=Future+Electronics, ComponentLink11Description=https://datasheet.octopart.com/RC0402JR-0710KL-Yageo-datasheet-73766026.pdf, ComponentLink11URL=https://datasheet.octopart.com/RC0402JR-0710KL-Yageo-datasheet-73766026.pdf, ComponentLink12Description=https://datasheet.octopart.com:443/RC0402JR-0710KL-Yageo-datasheet-8329306.pdf?src-supplier=element14, ComponentLink12URL=https://datasheet.octopart.com:443/RC0402JR-0710KL-Yageo-datasheet-8329306.pdf?src-supplier=element14, ComponentLink13Description=http://sigma.octopart.com:80/rohs_statement/Yageo-company-2.pdf?src-supplier=Compliance+Statements, ComponentLink13URL=http://sigma.octopart.com:80/rohs_statement/Yageo-company-2.pdf?src-supplier=Compliance+Statements, ComponentLink14Description=http://sigma.octopart.com:80/conflict_mineral_statement/Yageo-company-3.pdf?src-supplier=Compliance+Statements, ComponentLink14URL=http://sigma.octopart.com:80/conflict_mineral_statement/Yageo-company-3.pdf?src-supplier=Compliance+Statements, ComponentLink15Description=https://datasheet.octopart.com:443/AC1206JR-0710KL-Yageo-datasheet-182189377.pdf?src-supplier=IHS, ComponentLink15URL=https://datasheet.octopart.com:443/AC1206JR-0710KL-Yageo-datasheet-182189377.pdf?src-supplier=IHS, ComponentLink16Description=https://datasheet.octopart.com:443/AC1206JR-0710KL-Yageo-datasheet-86786639.pdf?src-supplier=Upverter, ComponentLink16URL=https://datasheet.octopart.com:443/AC1206JR-0710KL-Yageo-datasheet-86786639.pdf?src-supplier=Upverter, ComponentLink17Description=https://datasheet.octopart.com:443/AC1206JR-0710KL-Yageo-datasheet-178509465.pdf?src-supplier=Newark, ComponentLink17URL=https://datasheet.octopart.com:443/AC1206JR-0710KL-Yageo-datasheet-178509465.pdf?src-supplier=Newark, ComponentLink18Description=https://datasheet.octopart.com:443/AC1206JR-0710KL-Yageo-datasheet-166720450.pdf?src-supplier=JRH+Electronics, ComponentLink18URL=https://datasheet.octopart.com:443/AC1206JR-0710KL-Yageo-datasheet-166720450.pdf?src-supplier=JRH+Electronics, ComponentLink19Description=https://datasheet.octopart.com:443/AC1206JR-0710KL-Yageo-Group-datasheet-188689268.pdf?src-supplier=Farnell, ComponentLink19URL=https://datasheet.octopart.com:443/AC1206JR-0710KL-Yageo-Group-datasheet-188689268.pdf?src-supplier=Farnell, ComponentLink20Description=https://datasheet.octopart.com:443/AC1206JR-0710KL-Yageo-Group-datasheet-164768995.pdf?src-supplier=ODG+(Origin+Data+Global), ComponentLink20URL=https://datasheet.octopart.com:443/AC1206JR-0710KL-Yageo-Group-datasheet-164768995.pdf?src-supplier=ODG+(Origin+Data+Global), ComponentLink21Description=https://datasheet.octopart.com:443/AC1206JR-0710KL-Yageo-datasheet-151884373.pdf?src-supplier=Future+Electronics, ComponentLink21URL=https://datasheet.octopart.com:443/AC1206JR-0710KL-Yageo-datasheet-151884373.pdf?src-supplier=Future+Electronics, ComponentLink22Description=https://datasheet.octopart.com:443/AC1206JR-0710KL-Yageo-datasheet-137699919.pdf?src-supplier=Future+Electronics, ComponentLink22URL=https://datasheet.octopart.com:443/AC1206JR-0710KL-Yageo-datasheet-137699919.pdf?src-supplier=Future+Electronics, ComponentLink23Description=https://datasheet.octopart.com:443/AC1206JR-0710KL-Yageo-datasheet-83209224.pdf?src-supplier=Future+Electronics, ComponentLink23URL=https://datasheet.octopart.com:443/AC1206JR-0710KL-Yageo-datasheet-83209224.pdf?src-supplier=Future+Electronics, ComponentLink24Description=https://datasheet.octopart.com:443/AC1206JR-0710KL-Yageo-datasheet-62139191.pdf?src-supplier=Future+Electronics, ComponentLink24URL=https://datasheet.octopart.com:443/AC1206JR-0710KL-Yageo-datasheet-62139191.pdf?src-supplier=Future+Electronics, ComponentLink25Description=https://datasheet.octopart.com/AC1206JR-0710KL-Yageo-datasheet-12512238.pdf, ComponentLink25URL=https://datasheet.octopart.com/AC1206JR-0710KL-Yageo-datasheet-12512238.pdf, ComponentLink26Description=https://datasheet.octopart.com:443/RC1206JR-1310KL-Yageo-datasheet-175887523.pdf?src-supplier=IHS, ComponentLink26URL=https://datasheet.octopart.com:443/RC1206JR-1310KL-Yageo-datasheet-175887523.pdf?src-supplier=IHS, ComponentLink27Description=https://datasheet.octopart.com:443/RC1206JR-1310KL-Yageo-datasheet-164759695.pdf?src-supplier=Future+Electronics, ComponentLink27URL=https://datasheet.octopart.com:443/RC1206JR-1310KL-Yageo-datasheet-164759695.pdf?src-supplier=Future+Electronics, ComponentLink28Description=https://datasheet.octopart.com:443/RC1206JR-1310KL-Yageo-datasheet-137700087.pdf?src-supplier=Future+Electronics, ComponentLink28URL=https://datasheet.octopart.com:443/RC1206JR-1310KL-Yageo-datasheet-137700087.pdf?src-supplier=Future+Electronics, ComponentLink29Description=https://datasheet.octopart.com:443/RC1206JR-1310KL-Yageo-datasheet-27233761.pdf?src-supplier=Future+Electronics, ComponentLink29URL=https://datasheet.octopart.com:443/RC1206JR-1310KL-Yageo-datasheet-27233761.pdf?src-supplier=Future+Electronics, ComponentLink30Description=https://datasheet.octopart.com:443/RC1206JR-1310KL-Yageo-datasheet-13032847.pdf?src-supplier=Future+Electronics, ComponentLink30URL=https://datasheet.octopart.com:443/RC1206JR-1310KL-Yageo-datasheet-13032847.pdf?src-supplier=Future+Electronics, ComponentLink31Description=https://datasheet.octopart.com:443/RC1206JR-1310KL-Yageo-datasheet-8359522.pdf?src-supplier=Future+Electronics, ComponentLink31URL=https://datasheet.octopart.com:443/RC1206JR-1310KL-Yageo-datasheet-8359522.pdf?src-supplier=Future+Electronics, ComponentLink32Description=https://datasheet.octopart.com/RC1206JR-1310KL-Yageo-datasheet-73766026.pdf, ComponentLink32URL=https://datasheet.octopart.com/RC1206JR-1310KL-Yageo-datasheet-73766026.pdf, Composition="Thick Film", Contact Plating=Tin, Depth=500µm, Features="Moisture Resistant", Height=350µm, Lead Free="Lead Free", Length=1mm, Lifecycle Status=Production, Military Standard=Not, Mounting Technology="Surface Mount", Number of Terminals=2, Number of Terminations=2, Packaging="Tape & Reel", Pins=2, Power Rating=62.5mW, Pricing="1=0.1, 10=0.006, 25=0.0056, 50=0.0052, 100=0.0046, 250=0.00416, 500=0.00284 (USD)", Radiation Hardening=No, REACH SVHC=Yes, RoHS=Compliant, Schedule B="8533210045, 8533210045|8533210045, 8533210045|8533210045|8533210045, 8533210045|8533210045|8533210045|8533210045", Stock=11539169, Supplier=DigiKey, Termination=SMD/SMT, Voltage Rating (AC)=50V, Voltage Rating (DC)=50V, Width=500µm, Working Voltage=50V